# Altium PCB Tigershark 3D R2.3 - TR.PcbDoc (part 2 of 4)
Units mil, origin at the board's own origin, x right, y up, seen from the top; angles counter-clockwise.
Board outline 4100 x 4050 mil, 4 copper layers (Top Layer, Groun Plane, Power Plane, Bottom Layer), stack 61.73 mil thick; 367 components, 240 nets, 1160 pads, 805 vias.
Unrouted connection lines stored in the file: 6.
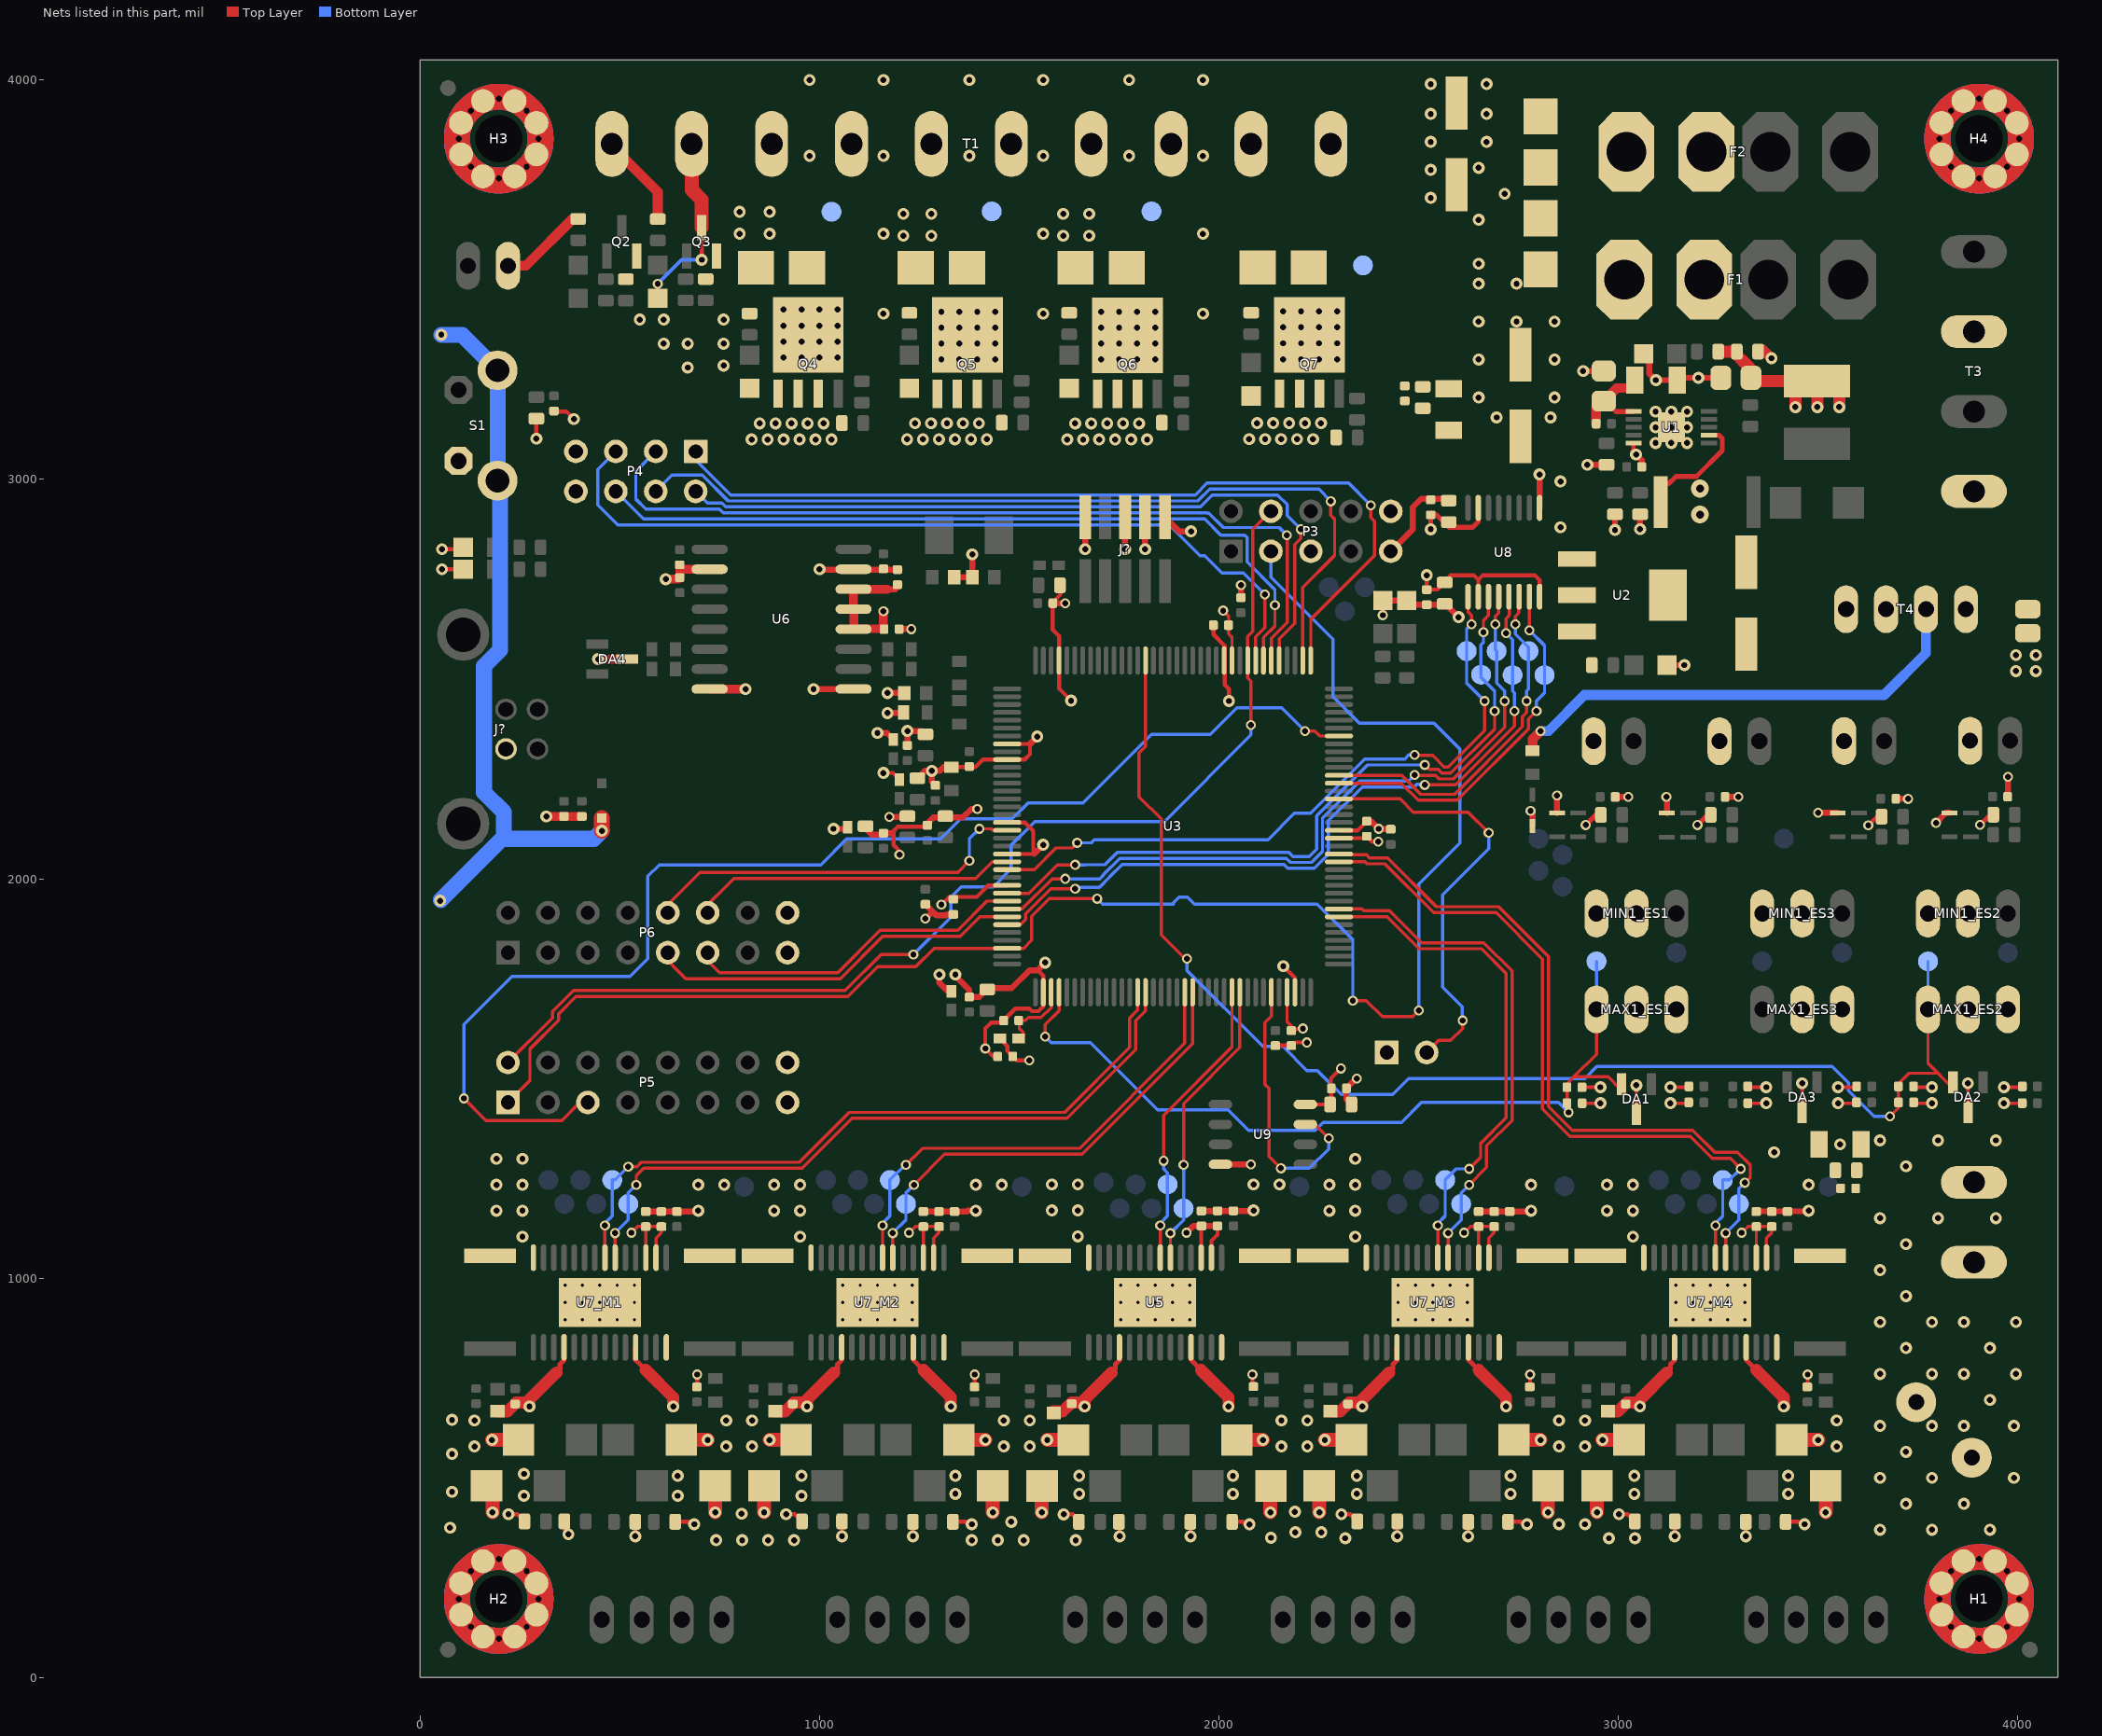
[diagram p4: the nets of this part, all layers, seen from the top]

## Part data
C1_ES1 C1_ES2 C1_ES3 C2_ES1 C2_ES2 C2_ES3: library part CC0402KRX7R8BB472, "CAP CER 0402 4.7nF 25V 10% X7R"
C3_M1 C3_M2 C3_M3 C3_M4 C5_M1 C5_M2 C5_M3 C5_M4 C6_M1 C6_M2 C6_M3 C6_M4 C8_M1 C8_M2 C8_M3 C8_M4 C52 C62 C67 C72: library part CC0603ZRY5V6BB105, "CAP CER 0603 1uF 10V Y5V"
C7: library part UPW1H471MHD1TO, "CAP ALU 470uF 50V 20%"
C9: library part C1206C475K5PACTU, "CAP CER 1206 4.7uF 50V 10% X5R"
C10: library part GRM21BR71H105KA12L, "CAP CER 0805 1uF 50V 10% X7R"
C11 C40: library part C0603C104K5RACTU, "CAP CER 0603 100nF 50V 10% X7R"
C12_M1 C12_M2 C12_M3 C12_M4 C14_M1 C14_M2 C14_M3 C14_M4 C51 C63 C69 C70 C75_M1 C75_M2 C75_M3 C75_M4: library part "100nF C0402 - GRM155R71C104KA88D", "Capacitor (Semiconductor SIM Model)"
C13 C17 C25 C28 C29 C32 C36 C55 C60: library part C1608JB0J106K080AB, "CAP CER 10UF 6.3V 10% JB 0603"
C15 C16 C18: "CAP ALUM 100UF 35V 20% SMD"
C20 C26: library part GRM155R71C104KA88D, "CAP CER 0.1UF (100nF) 16V 10% X7R 0402"
C21: library part C0805C106K8PACTU, "CAP CER 0805 10uF 10V 10% X5R"
C22: library part GRM155R60J105KE19D, "CAP CER 0402 1uF 6.3V 10% X5R"
C23 C27 C30_TR1 C30_TR2 C30_TR3 C30_TR4 C33 C34 C37 C38 C39 C41 C42 C45 C46 C47 C48 C53 C54 C56 C57 C58 C59 C61 C64 C65 C74: library part GRM155R71C104KA88D, "CAP CER 0402 100nF 16V 10% X7R"
C24 C50 C71_M1 C71_M2 C71_M3 C71_M4: library part GRM155R60J474KE19D, "0.47uF 6.3v C0402 - GRM155R60J474KE19D"
C35 C43 C44 C66_M1 C66_M2 C66_M3 C66_M4 C73: library part "Cap Semi", "Capacitor (Semiconductor SIM Model)"
C49 C68_M1 C68_M2 C68_M3 C68_M4: library part GRM155R71H103JA88D, "CAP CER 10000PF 50V X7R 0402"
C77 C80: library part CL31A106KBHNNNE, "CAP CER 10UF 50V 10% X5R 1206"
C78 C81: library part CL10B104KB8SFNC, "CAP CER 0.1UF 50V 10% X7R 0603"
C79 C82: library part CL05B103JB5NNNC, "CAP CER 10000PF 50V 5% X7R 0402"
D1: library part "D Zener", "Zener Diode"
D2: library part SK310A, "DIODE Schottky 3A SMA"
D3_TR1 D3_TR2 D3_TR3 D3_TR4 D5_TR1 D5_TR2 D5_TR3 D5_TR4: "High Conductance Fast Diode"
D4 D6 D12 D15 D17 D19: library part "D Schottky", "Schottky Diode"
D7 D9: "LED 0805 Red"
D8: "DIODE TVS"
D10 D11 D13 D14 D16 D18 D24 D29 D30 D31: "LED 0805 Yellow"
D20_M1 D20_M2 D20_M3 D20_M4 D21_M1 D21_M2 D21_M3 D21_M4 D22_M1 D22_M2 D22_M3 D22_M4 D23_M1 D23_M2 D23_M3 D23_M4 D25 D26 D27 D28: "DIODE TVS 30V SMA"
DA1 DA2 DA3 DA4: "PESDxL2BT TVS Diode Array 2x"
F1 F2: library part "Fuse 1", "Fuse"
J?: library part "ARM Cortex JTAG-DEBUG Header"
JP1: "SMD solder jumper"
L1: "IND 15uH 3.9A 20%"
M1_M1 M1_M2 M1_M3 M1_M4 M2 M3 T4: library part "Molex 0705430003 Alt", "Molex 4 Pin Clip Connector"
MAX1_ES1 MAX1_ES2 MAX1_ES3 MIN1_ES1 MIN1_ES2 MIN1_ES3: library part "Molex Endstop"
P1: library part "Header 2", "Header, 2-Pin"
P3: "Header, 5-Pin, Dual row"
P4: "Header, 4-Pin, Dual row"
P5 P6: "16 Pos 2.54mm Pin Connector Shrouded"
Q2 Q3 Q4 Q5 Q6 Q7: "N-Channel MOSFET"
R1: "Resistor"
R2_ES1 R2_ES2 R2_ES3 R3_ES1 R3_ES2 R3_ES3: library part ERJ-2GEJ272X, "RES SMD 2.7K OHM 5% 1/10W 0402"
R4 R5 R15 R16 R18 R20 R22 R23 R31_M1 R31_M2 R31_M3 R31_M4 R37: library part Res3, "Resistor"
R6 R46 R55 R59 R63 R67 R71: library part RC0603FR-07100KL, "RES 100K OHM 1/10W 1% 0603 SMD"
R7 R10 R12 R21: library part ERJ-3EKF1002V, "RES 0603 10K 100mW 1%"
R8 R11 R25 R26 R27 R28: library part ERJ-3EKF1001V, "RES 0603 1K 100mW 1%"
R9: library part RL2512FK-070R06L, "RES 0.06 OHM 1W 1% 2512 SMD"
R13 R47 R56 R60 R64 R68: library part RC0603JR-071K8L, "RES 0603 1.8K 100mW 5%"
R14_TR1 R14_TR2 R14_TR3 R14_TR4 R19_TR1 R19_TR2 R19_TR3 R19_TR4: library part ERJ3EKF4701V, "RES 0603 4.7K 100mW 1%"
R17: library part CRCW0402200KFKED, "RES 0402 22r 63mW 1%"
R24 R30_M1 R30_M2 R30_M3 R30_M4 R36: library part ERJ2GEJ105X, "RES 0402 1M 100mW 5%"
R32_M1 R32_M2 R32_M3 R32_M4 R33_M1 R33_M2 R33_M3 R33_M4 R38 R39: library part CSRN2512FTR100, "RES SMD 0.1 OHM 1% 2W 2512"
R45 R52 R58 R62 R66 R70: library part CRCW060310R0FKEA, "RES 0603 10r 100mW 1%"
S1: library part 1571610-2_1, "SWTCH Momentary Washable"
T1: library part "0395311010 - Molex 10 Position Connector", "MSBTV10 10 port connector same as RAMBo"
T2: library part con-phoenix-508_2
T3: library part con-phoenix-508_4
TP2 TP6 TP7 TP8 TP9_ES1 TP9_ES2 TP9_ES3 TP10_ES1 TP10_ES2 TP10_ES3 TP11 TP12 TP13 TP14 TP15 TP16 TP17 TP18 TP19 TP20 TP21 TP32_M1 TP32_M2 TP32_M3 TP32_M4 TP33_M1 TP33_M2 TP33_M3 TP33_M4 TP35_M1 TP35_M2 TP35_M3 TP35_M4 TP36_M1 TP36_M2 TP36_M3 TP36_M4 TP37_M1 TP37_M2 TP37_M3 TP37_M4 TP38 TP39_M1 TP39_M2 TP39_M3 TP39_M4 TP40_M1 TP40_M2 TP40_M3 TP40_M4 TP43 TP44 TP45 TP46 TP47 TP52_TR1 TP52_TR2 TP52_TR3 TP52_TR4: library part Socket, "Socket"
U1: library part LM25011, "REG BUCK"
U5 U7_M1 U7_M2 U7_M3 U7_M4: "DRV8825 Ti Stepper Driver"
U6: "USB Opto Isolator"
U8: library part TXB0106, "TXB0106 - Bidriectional Opendrain/pushpull level shift"
X2: library part XTAL, "Crystal Oscillator"

## Via types
v1: diameter 30, hole 15, Top Layer to Bottom Layer, tented both sides, 465 vias
v2: diameter 25, hole 15, Top Layer to Bottom Layer, tented both sides, 192 vias
v3: diameter 19.68, hole 7.87, Top Layer to Bottom Layer, 75 vias
v4: diameter 25, hole 15, Top Layer to Bottom Layer, 61 vias
v5: diameter 30, hole 15, Top Layer to Bottom Layer, 9 vias
v6: diameter 45, hole 20, Top Layer to Bottom Layer, tented both sides, 2 vias
v7: diameter 25, hole 15, Top Layer to Bottom Layer, tented bottom, 1 vias

## Nets (pads, with @x,y where several pads share a name; then routed paths per layer and width w, separated by ;. In a path a pad name is that pad's centre, name@x,y a point inside that pad or via, vN(x,y) a via of type N, cw(c..) or ccw(c..) an arc to the next point about the centre after c; other vN are vias at no path point)
3.3VCC: C12_M1.2 C12_M2.2 C12_M3.2 C12_M4.2 C14_M1.2 C14_M2.2 C14_M3.2 C14_M4.2 C18.1 C25.2 C26.2 C29.2 C34.1 C45.1 C46.1 C47.1 C48.1 C56.1 C64.1 C69.2 C70.2 C74.1 FB5.1 FB6.1 FB7.1 FB8.1 FB9.1 J?.1@1865,2904.92 MAX1_ES1.3 MAX1_ES2.3 MAX1_ES3.3 MIN1_ES1.3 MIN1_ES2.3 MIN1_ES3.3 P1.1 P3.10 P4.8 P5.16 P6.16 R2_ES1.2 R2_ES2.2 R2_ES3.2 R3_ES1.2 R3_ES2.2 R3_ES3.2 R6.2 R11.2 R19_TR1.2 R19_TR2.2 R19_TR3.2 R19_TR4.2 R21.2 T4.1 U2.3 U3.11 U3.62 U3.105 U3.125 U5.16 U5.17 U6.12 U6.13 U6.14 U7_M1.16 U7_M1.17 U7_M2.16 U7_M2.17 U7_M3.16 U7_M3.17 U7_M4.16 U7_M4.17 U8.2 U8.8 U9.8 | length 3611.2
  Top Layer w8: v2(528.74,1113.74) 544.74,1129.74 C12_M1.2@563.74,1129.74 ; U7_M1.17@565.16,1052.2 565.16,1128.32 C12_M1.2@563.74,1129.74 ; U7_M1.16@588.74,1054.21 590.75,1052.2 590.75,1100.75 603.74,1113.74 C14_M1.2@603.74,1128.74 ; C14_M1.2@603.74,1129.74 C12_M1.2@563.74,1129.74 ; R6.2@1211.77,2155 R6.2@1215,2151.77 ; v2(1223.74,1113.74) 1239.74,1129.74 C12_M2.2@1258.74,1129.74 ; U7_M2.17@1260.16,1052.2 1260.16,1128.32 C12_M2.2@1258.74,1129.74 ; U7_M2.16@1283.74,1054.21 1285.75,1052.2 1285.75,1100.75 1298.74,1113.74 C14_M2.2@1298.74,1128.74 ; C14_M2.2@1298.74,1129.74 C12_M2.2@1258.74,1129.74 ; J?.1@1865,2904.92 J?.1@1865.08,2905 ; v2(2010.47,2671.46) 2024.47,2657.46 2024.47,2627.54 2023.56,2626.63 2023.56,2613.37 2032.64,2604.29 U3.11@2032.64,2546.46 ; U3.105@2170.43,1715.75 2170.43,1641.77 2181.1,1631.1 2181.1,1620.1 2186.2,1615 2196.2,1625 v2(2210,1625) ; v4(2613.74,1113.74) 2629.74,1129.74 C12_M3.2@2648.74,1129.74 ; U7_M3.17@2650.16,1052.2 2650.16,1128.32 C12_M3.2@2648.74,1129.74 ; U7_M3.16@2673.74,1054.21 2675.75,1052.2 2675.75,1100.75 2688.74,1113.74 C14_M3.2@2688.74,1128.74 ; C14_M3.2@2688.74,1129.74 C12_M3.2@2648.74,1129.74 ; R3_ES1.2@2909,1438.03 v1(2955,1438.03) ; v1(3130,1438.03) R2_ES1.2@3176,1438.03 ; v4(3308.74,1113.74) 3324.74,1129.74 C12_M4.2@3343.74,1129.74 ; R3_ES3.2@3324,1438.03 v1(3370,1438.03) ; U7_M4.17@3345.16,1052.2 3345.16,1128.32 C12_M4.2@3343.74,1129.74 ; U7_M4.16@3368.74,1054.21 3370.75,1052.2 3370.75,1100.75 3383.74,1113.74 C14_M4.2@3383.74,1128.74 ; C14_M4.2@3383.74,1129.74 C12_M4.2@3343.74,1129.74 ; v1(3550,1438.03) R2_ES3.2@3596,1438.03 ; R3_ES2.2@3739,1438.03 v1(3785,1438.03) ; v1(3965,1438.03) R2_ES2.2@4011,1438.03
  Top Layer w10: v1(291,3102) R21.2@291,3149.47 ; v1(1160,2265) 1183.62,2265 FB7.1@1200,2248.62 ; v2(1305,1935) 1324.5,1954.5 1393.54,1954.5 1422.51,1983.46 U3.62@1469.65,1983.46 ; FB9.1@1451.38,1600 1470,1581.38 1470,1569 1484,1555 1494,1545 v4(1525,1545) ; U5.17@1955.42,1051.94 C69.2@1955.42,1129.9 ; U5.16@1981.01,1051.94 1981.01,1093.49 1996.26,1108.74 C70.2@1996.26,1130.74 ; U9.8@2216.3,1435 C29.2@2278.23,1435 2281,1437.77 2281,1475 2280,1476 2280,1500 v2(2305,1525) ; U3.125@2300.35,2101.57 C46.1@2365.57,2101.57 ; C46.1@2371,2105 2383,2093 v2(2398.5,2093) ; v1(2520,2760) C26.2@2520,2724 2547.23,2724 C25.2@2565,2741.77 ; C25.2@2560,2740 2580,2760 2637.44,2760 2649.02,2748.42 ; U8.2@2649.02,2706.22 2649.02,2748.42 ; U8.8@2802.57,2706.22 2802.57,2747.87 2790.44,2760 2660.61,2760 2649.02,2748.42 ; v2(3625.47,2133.7) 3647.24,2155.47 R19_TR4.2@3655.94,2155.47 ; R19_TR3.2@3935,2161.42 R19_TR3.2@3935.94,2160.47
  Top Layer w12: v2(2917.95,2134.53) 2943.42,2160 R19_TR2.2@2956.18,2160 ; v2(3197.95,2134.53) 3223.42,2160 R19_TR1.2@3231.18,2160 ; v2(3905.47,2135) R19_TR3.2@3933.44,2162.97
  Top Layer w15: v1(1035,2125) 1059.72,2125 FB5.1@1060,2124.72 ; v1(1145,2365) 1168.62,2365 FB8.1@1185,2348.62 ; 1170,2725 1190,2725 C56.1@1201,2736 ; v2(1175,2155) 1201.77,2155 1206.77,2150 R6.2@1211.77,2155 ; v1(1300,1760) 1300,1739.72 FB6.1@1320,1719.72 ; J?.1@1865.08,2905 1900.08,2870 v1(1930,2870) ; v4(1918.77,1113.71) 1935.8,1130.74 C69.2@1956.26,1130.74 C70.2@1996.26,1130.74 ; C46.1@2370,2106 C46.1@2371,2105
  Top Layer w22: v2(1160,2670) 1160,2626 1086.12,2626 1086.12,2674 U6.13@1085.12,2675 U6.14@1085.12,2725 1170,2725
+5VCC: C11.1 C17.2 C20.2 C21.1 L1.2 R7.2 R8.2 R10.1 T4.2 U2.1 U8.15 | length 738.4
  Top Layer w12: v1(2530,2875) C20.2@2530,2911 ; C20.2@2530,2916 2531.51,2915.49 2544.88,2911 2575.88,2880 2635,2880 2649.02,2894.02 U8.15@2649.02,2928.66
  Top Layer w15: v1(2922.31,3036.43) 2970.09,3036.43 R7.2@2970.32,3036.65 ; v1(3054.31,2875.43) R10.1@3054.31,2912.66
  Top Layer w30: R8.2@3249.77,3320 3287.82,3320 C21.1@3329.51,3278.31 ; C21.1@3339.98,3246.17 L1.2@3497.31,3246.17 ; v1(3443,3181) L1.2@3443,3241.17 ; v1(3498,3181) L1.2@3498,3245.48 ; v1(3553,3181) L1.2@3553,3246
  other v1: 2855,2880 2855,2995
+12VCC1: C7.1 C35.1 C66_M1.1 C66_M2.1 C66_M3.1 C66_M4.1 C80.1 C81.1 C82.2 R30_M1.2 R30_M2.2 R30_M3.2 R30_M4.2 R36.2 T2.1 U5.4 U5.11 U7_M1.4 U7_M1.11 U7_M2.4 U7_M2.11 U7_M3.4 U7_M3.11 U7_M4.4 U7_M4.11 | length 2331.6
  Top Layer w12: 341.26,763.74 350.26,772.74 350.26,784.25 360.43,794.42 U7_M1.4@360.43,826.8 U7_M1.4@360.43,827.8 ; U7_M1.11@539.57,827.8 539.57,795.43 565,770 ; 1036.26,763.74 1045.26,772.74 1045.26,784.25 1055.43,794.42 U7_M2.4@1055.43,826.8 U7_M2.4@1055.43,827.8 ; U7_M2.11@1234.57,827.8 1234.57,795.43 1260,770 ; 1731.29,763.71 1740.29,772.71 1740.29,784.22 1750.46,794.39 U5.4@1750.46,826.76 ; U5.11@1929.6,827.76 1929.6,795.4 1955.03,769.97 ; 2426.26,763.74 2435.26,772.74 2435.26,784.25 2445.43,794.42 U7_M3.4@2445.43,826.8 U7_M3.4@2445.43,827.8 ; U7_M3.11@2624.57,827.8 2624.57,795.43 2650,770 ; 3121.26,763.74 3130.26,772.74 3130.26,784.25 3140.43,794.42 U7_M4.4@3140.43,826.8 U7_M4.4@3140.43,827.8 ; U7_M4.11@3319.57,827.8 3319.57,795.43 3345,770
  Top Layer w30: C66_M1.1@193.74,666.18 218.7,666.18 241.26,688.74 263.74,688.74 v1(273.74,678.74) 273.74,696.22 341.26,763.74 ; 565,770 633.74,701.26 v1(633.74,678.74) ; C66_M2.1@888.74,666.18 913.7,666.18 936.26,688.74 958.74,688.74 v1(968.74,678.74) 968.74,696.22 1036.26,763.74 ; 1260,770 1328.74,701.26 v1(1328.74,678.74) ; C35.1@1583.77,666.15 1608.73,666.15 1631.29,688.71 1653.77,688.71 v1(1663.77,678.71) 1663.77,696.19 1731.29,763.71 ; 1955.03,769.97 2023.77,701.23 v1(2023.77,678.71) ; C66_M3.1@2278.74,666.18 2303.7,666.18 2326.26,688.74 2348.74,688.74 v1(2358.74,678.74) 2358.74,696.22 2426.26,763.74 ; 2650,770 2718.74,701.26 v1(2718.74,678.74) ; C66_M4.1@2973.74,666.18 2998.7,666.18 3021.26,688.74 3043.74,688.74 v1(3053.74,678.74) 3053.74,696.22 3121.26,763.74 ; 3345,770 3413.74,701.26 v1(3413.74,678.74)
  other v1: 741.26,343.74 806.26,343.74 871.26,343.74 936.26,343.74 1381.26,343.74 1446.26,343.74 1511.26,343.74 1641.26,343.74 2316.26,348.74 2976.26,348.74 3041.26,348.74 2130,350 2191.26,363.74 2256.26,363.74 3655,370 3785,370 75,375 2851.26,383.74 2916.26,383.74 1480,390 805,410 2190,415 3720,435 260,455 645,455 955,455 1340,460 1650,460 2035,460 2345,460 2730,460 3040,460 3425,460 80,465 3655,500 3785,500 645,505 955,505 1340,505 1650,505 2035,505 2345,505 2730,505 3040,505 3425,505 260,510 80,560 3720,565 136.26,578.74 766.26,578.74 831.26,578.74 1461.26,578.74 1526.26,578.74 2156.29,578.71 2221.29,578.71 2851.26,578.74 2916.26,578.74 3546.26,578.74 3655,630 3785,630 136.26,643.74 766.26,643.74 831.26,643.74 1461.26,643.74 1526.26,643.74 2156.29,643.71 2221.29,643.71 2851.26,643.74 2916.26,643.74 3546.26,643.74 80,645 3655,760 3785,760 3720,825 3655,890 3785,890 3720,955 3655,1020 3720,1085 3655,1150 3800,1150 3945,1150 3720,1280 3655,1345 3800,1345 3945,1345
+12VCC2: C9.1 C10.1 C16.1 C77.1 C78.1 C79.2 D6.2 D12.2 D15.2 D17.2 F1.2 FAN-1.1 R1.2 R13.2 R17.2 R47.2 R56.2 R60.2 R64.2 T1.1 T1.3 T1.5 T1.7 T4.3 U1.1 | length 1845.7
  Top Layer w12: C10.1@2984.68,3178.95 2993.83,3169.8 U1.1@3037.83,3169.8
  Top Layer w24: R17.2@2944.31,3139.43 C10.1@2944.31,3177.02 ; C10.1@2963.31,3196.02 2995.72,3228.43 C9.1@3021.15,3228.43
  Top Layer w25: FAN-1.1@230,3535 265,3535 382.34,3652.34 R13.2@396,3652.34 ; T1.1@480,3810 T1.1@495,3795 ; T1.1@480,3835 595,3720 R47.2@595,3651.77 ; R1.2@2785,2320.83 2785,2350 v2(2805,2370)
  Bottom Layer w25: v2(2805,2370) 2825,2370 2915,2460 3665,2460 3770,2565 T4.3@3770,2675
  other v1: 2650,3205 2840,3205 2650,3300 2840,3300 2650,3395 2745,3395 2840,3395 2650,3490 2745,3490 1210,3610 1280,3610 1610,3610 1675,3610 800,3615 875,3615 1210,3665 1280,3665 1610,3665 1675,3665 800,3670 875,3670
+12VCC3: C15.1 D4.2 D19.2 F2.2 R68.2 T1.9
  other v1: 2530,3705 2530,3775 2530,3845 2670,3845 2530,3915 2670,3915 2530,3990 2670,3990
AVREF: C65.1 FB9.2 U3.75 | length 169
  Top Layer w8: C65.1@1499,1645 1515,1645 1522.31,1652.31 1554.56,1652.31 1579.88,1677.64 U3.75@1579.88,1715.75 ; C65.1@1500,1636 1500,1625 1510,1615 FB9.2@1510,1603.62
BED_PWM: TP38.1 U3.132 U8.7 | length 932.7
  Top Layer w8: U3.132@2300.35,2239.37 2456.18,2239.37 2499.05,2196.5 2596.5,2196.5 2775,2375 2775,2400 v2(2795,2420) ; U8.7@2775,2704.24 U8.7@2776.98,2706.22 v2(2776.98,2621.98)
  Bottom Layer w8: v2(2776.98,2621.98) 2815,2583.95 TP38.1@2815,2510 2815,2465 2795,2445 v2(2795,2420)
DIR1: TP39_M1.1 U3.87 U7_M1.20 | length 1761
  Top Layer w8: U7_M1.20@488.39,1052.2 v2(488.39,1112.64) ; v2(541.26,1233.74) 541.26,1256.26 560,1275 956.07,1275 1081.07,1400 1619.71,1400 1791.5,1571.79 1791.5,1644.73 1816.1,1669.34 U3.87@1816.1,1715.75
  Bottom Layer w8: v2(488.39,1112.64) 521.23,1145.48 TP39_M1.1@521.23,1185.77 521.23,1213.71 v2(541.26,1233.74)
DIR2: TP39_M2.1 U3.93 U7_M2.20 | length 1176.6
  Top Layer w8: U7_M2.20@1183.39,1052.2 v2(1183.39,1112.64) ; v2(1236.26,1233.74) 1312.52,1310 1657.43,1310 1934.21,1586.79 U3.93@1934.21,1715.75
  Bottom Layer w8: v2(1183.39,1112.64) 1216.23,1145.48 TP39_M2.1@1216.23,1185.77 1216.23,1213.71 v2(1236.26,1233.74)
DIR3: TP39_M3.1 U3.116 U7_M3.20 | length 1280.8
  Top Layer w8: U3.116@2300.35,1924.41 2357.8,1924.41 2362.48,1919.72 2427.15,1919.72 2506.87,1840 2662.72,1840 2733.5,1769.22 2733.5,1395.01 2670,1331.51 2670,1277.48 v4(2626.26,1233.74) ; U7_M3.20@2573.39,1052.2 v4(2573.39,1112.64)
  Bottom Layer w8: v4(2573.39,1112.64) 2606.23,1145.48 TP39_M3.1@2606.23,1185.77 2606.23,1213.71 v4(2626.26,1233.74)
DIR4: TP39_M4.1 U3.123 U7_M4.20 | length 1828.5
  Top Layer w8: U3.123@2300.35,2062.2 2302.56,2060 2369.33,2060 2376.83,2052.5 2421.65,2052.5 2544.15,1930 2700,1930 2825,1805 2825,1430 2885,1370 3186.21,1370 3241.21,1315 3298.23,1315 3330,1283.23 3330,1252.54 v4(3316.23,1238.77) ; U7_M4.20@3268.39,1052.2 v4(3268.39,1112.64)
  Bottom Layer w8: v4(3268.39,1112.64) 3301.23,1145.48 TP39_M4.1@3301.23,1185.77 3301.23,1223.77 v4(3316.23,1238.77)
DIR_EXP1: P6.11 U3.64 | length 864.5
  Top Layer w8: P6.11@700,1815 750,1765 1045.7,1765 1151.68,1870.98 1345.98,1870.98 1419.09,1944.09 U3.64@1469.65,1944.09
DIR_EXP2: P6.12 U3.59 | length 822.5
  Top Layer w8: P6.12@700,1915 786,2001 1391,2001 1432.52,2042.52 U3.59@1469.65,2042.52
DIR_Z: TP20.1 U3.99 U5.20 | length 735.6
  Top Layer w8: U5.20@1878.42,1052.17 v4(1878.42,1112.61) ; v4(1911.26,1283.74) 1911.26,1436.55 2052.32,1577.62 U3.99@2052.32,1715.75
  Bottom Layer w8: v4(1878.42,1112.61) 1911.26,1145.45 TP20.1@1911.26,1174.74 v4(1911.26,1283.74)
EN1: TP32_M1.1 U3.86 U7_M1.21 | length 1780.1
  Top Layer w8: U7_M1.21@462.8,1052.2 v2(462.8,1132.05) ; v2(521.26,1278.74) 542.53,1278.74 553.79,1290 949.85,1290 1074.85,1415 1613.49,1415 1776.5,1578.01 1776.5,1650.95 1796.42,1670.86 U3.86@1796.42,1715.75
  Bottom Layer w8: v2(462.8,1132.05) 462.8,1137.34 481.23,1155.77 TP32_M1.1@481.23,1245.77 488.29,1245.77 v2(521.26,1278.74)
EN2: TP32_M2.1 U3.92 U7_M2.21 | length 1206.8
  Top Layer w8: U7_M2.21@1157.8,1052.2 v2(1157.8,1132.05) ; v2(1216.26,1283.74) 1257.52,1325 1651.21,1325 1914.53,1588.31 U3.92@1914.53,1715.75
  Bottom Layer w8: v2(1157.8,1132.05) 1157.8,1137.34 1176.23,1155.77 TP32_M2.1@1176.23,1245.77 v2@1214.2,1283.74
EN3: TP32_M3.1 U3.115 U7_M3.21 | length 1277.1
  Top Layer w8: U3.115@2300.35,1904.72 2420.94,1904.72 2500.66,1825 2656.51,1825 2718.5,1763.01 2718.5,1401.22 2655,1337.72 2655,1302.48 v4(2626.26,1273.74) ; U7_M3.21@2547.8,1052.2 v4(2547.8,1132.05)
  Bottom Layer w8: v4(2547.8,1132.05) 2547.8,1137.34 2566.23,1155.77 TP32_M3.1@2566.23,1245.77 2594.2,1273.74 v4(2626.26,1273.74)
EN4: TP32_M4.1 U3.122 U7_M4.21 | length 1801.8
  Top Layer w8: U3.122@2300.35,2042.52 2365.6,2042.52 2370.62,2037.5 2415.44,2037.5 2537.94,1915 2693.79,1915 2810,1798.79 2810,1423.79 2878.79,1355 3180,1355 3235,1300 3280,1300 v4(3306.23,1273.77) ; U7_M4.21@3242.8,1052.2 v4(3242.8,1132.05)
  Bottom Layer w8: v4(3242.8,1132.05) 3242.8,1137.34 3261.23,1155.77 TP32_M4.1@3261.23,1245.77 3278.23,1245.77 v4(3306.23,1273.77)
EN_EXP1: P6.9 U3.66 | length 960.7
  Top Layer w8: P6.9@600,1815 665,1750 1051.91,1750 1157.9,1855.98 1352.2,1855.98 1400.94,1904.72 U3.66@1469.65,1904.72
EN_EXP2: P6.10 U3.55 | length 990.4
  Top Layer w8: P6.10@600,1915 701,2016 1346,2016 v2(1375,2045) ; v2(1400,2125) 1430,2125 1433.74,2121.26 U3.55@1469.65,2121.26
  Bottom Layer w8: v2(1375,2045) 1375,2100 v2(1400,2125)
EN_Z: TP16.1 U3.98 U5.21 | length 746.3
  Top Layer w8: U5.21@1852.83,1052.17 v4(1852.83,1132.02) ; v4(1861.26,1293.74) 1861.26,1407.77 2032.64,1579.15 U3.98@2032.64,1715.75
  Bottom Layer w8: v4(1852.83,1132.02) 1852.83,1137.31 1871.26,1155.74 1871.26,1263.74 1861.26,1273.74 v4(1861.26,1293.74)
ERASE: P1.2 U3.130 | length 1083.1
  Top Layer w8: U3.130@2300.35,2200 2453.13,2200 2486.63,2166.5 2623.5,2166.5 v2(2675,2115) ; P1.2@2520,1565 2550,1595 2580,1595 2610,1625 v2(2610,1645)
  Bottom Layer w8: v2(2610,1645) 2608.5,1646.5 2608.5,1679.73 2560,1728.23 2560,1960 2675,2075 v2(2675,2115)
EXP_CS: P3.5
EXP_CS2: P5.5 U3.138 | length 3185.8
  Top Layer w8: v2(110,1450) 165,1395 355,1395 P5.5@400,1440 ; v2(2215,2370) 2240,2370 2252.52,2357.48 U3.138@2300.35,2357.48
  Bottom Layer w8: v2(110,1450) 110,1635 230,1755 525,1755 570,1800 570,2006.36 598.64,2035 1002.98,2035 1067.98,2100 1303.49,2100 1353.49,2150 1482.16,2150 1522.16,2190 1659.85,2190 1831.35,2361.5 1978.27,2361.5 2045.27,2428.5 2156.5,2428.5 v2(2215,2370)
FET_PWM1: TP43.1 U3.60 U8.1 | length 1716.7
  Top Layer w8: U3.60@1469.65,2022.83 1537.83,2022.83 1592.1,2077.1 1632.1,2077.1 v2(1645,2090) ; v2(2490,2310) 2491.5,2308.5 2534.99,2308.5 2563.49,2280 2573.93,2280 2665,2371.07 v2@2665,2435 ; U8.1@2623.43,2706.22 2623.43,2668.34 2631.98,2659.79 v2(2631.98,2636.98)
  Bottom Layer w8: v2(1645,2090) 1680,2090 1687.89,2097.89 2122.89,2097.89 2188.91,2163.91 2229.05,2163.91 2365.15,2300 2465,2300 2475,2310 v2(2490,2310) ; v2(2631.98,2636.98) 2620,2625 TP43.1@2620,2570 2620,2490 v2(2665,2445)
FET_PWM2: TP44.1 U3.63 U8.3 | length 1802.5
  Top Layer w8: U3.63@1469.65,1963.78 1524.03,1963.78 1595.25,2035 v2(1640,2035) ; v2(2515,2285) 2526.5,2273.5 2548.78,2273.5 2557.28,2265 2580.15,2265 2690,2374.85 v2@2690,2410 ; v2(2661.98,2616.98) 2661.98,2646.98 2674.61,2659.61 U8.3@2674.61,2706.22 U8.3@2675,2705.83
  Bottom Layer w8: v2(1640,2035) 1664.23,2035 ; 1664.23,2035.1 1714.44,2035.1 1745.23,2065.89 2175.02,2065.89 2185.02,2055.89 2225.89,2055.89 2244.05,2074.05 2244.05,2157.69 2371.36,2285 v2(2515,2285) ; TP44.1@2655,2505 2690,2470 v2(2690,2420) ; TP44.1@2656.1,2511.1 2656,2511.2 2656,2586 2661.98,2591.98 v2(2661.98,2616.98)
FET_PWM3: TP45.1 U3.65 U8.4 | length 1830
  Top Layer w8: U3.65@1469.65,1924.41 1506.98,1924.41 1582.57,2000 v2(1615,2000) ; v2(2490,2260) 2491.5,2258.5 2542.57,2258.5 2551.07,2250 2586.36,2250 2715,2378.64 v2@2715,2435 ; v2(2691.98,2636.98) 2691.98,2656.98 2700,2665 2700,2706.02 U8.4@2700.2,2706.22
  Bottom Layer w8: v2(1615,2000) 1701.21,2000 1711.5,2010.29 1711.5,2010.95 1751.44,2050.89 2168.8,2050.89 2178.8,2040.89 2232.1,2040.89 2259.05,2067.84 2259.05,2151.48 2352.57,2245 2475,2245 v2(2490,2260) ; v2(2691.98,2636.98) 2691.98,2573.02 TP45.1@2695,2570 2695,2490 2715,2470 v2(2715,2445)
FET_PWM4: TP46.1 U3.67 U8.5 | length 1881.2
  Top Layer w8: U3.67@1469.65,1885.04 1503.4,1885.04 1516.08,1897.72 1516.08,1912.29 1578.79,1975 v2(1640,1975) ; v2(2515,2235) 2592.57,2235 2740,2382.43 v2(2740,2420) ; v2(2718.48,2615.22) 2718.48,2651.5 2726.98,2660 2726.98,2703.45 2725,2705.42 U8.5@2725.8,2706.22
  Bottom Layer w8: v2(1640,1975) 1643.5,1978.5 1700.93,1978.5 1726.5,2004.07 1726.5,2004.73 1757.66,2035.89 2162.59,2035.89 2172.59,2025.89 2238.32,2025.89 2274.05,2061.63 2274.05,2145.27 2358.79,2230 2488.5,2230 2495,2236.5 2513.5,2236.5 v2(2515,2235) ; v2(2718.48,2615.22) 2735,2598.7 TP46.1@2735,2510 2735,2470 2740,2465 v2(2740,2420)
FET_PWM5: TP47.1 U3.133 U8.6 | length 888.4
  Top Layer w8: U3.133@2300.35,2259.06 2457.71,2259.06 2505.27,2211.5 2590.29,2211.5 2760,2381.21 2760,2406.21 2770,2416.21 v2@2770,2435 ; v2(2741.98,2636.98) 2741.98,2656.98 2750,2665 2750,2704.83 U8.6@2751.39,2706.22
  Bottom Layer w8: v2(2741.98,2636.98) 2741.98,2613.02 2775,2580 TP47.1@2775,2570 2775,2475 2770,2470 v2(2770,2445)
FGND: D8.C H1.1 H2.1 H3.1 H4.1 JP1.1 S1.3 S1.4 | length 1916.2
  Top Layer w40: v1(455,2120) D8.C@455,2151.69
  Bottom Layer w40: v1@52,1947 205,2100 435,2100 v1(455,2120) ; v1(53,3362) 105,3362 S1.3@194,3273 S1.4@194,2997 200.25,2990.75 200.25,2572.95 160,2532.7 160,2216.4 210,2166.4 210,2105
  Bottom Layer w50: 122.6,271.1 H2.1@126.85,266.85 ; 122.6,3778.9 H3.1@126.85,3783.15 ; 3828.9,3927.4 H4.1@3833.15,3923.15 ; H1.1@3973.15,266.85 3977.4,271.1
  other v1: 50,1945 3995,2520 4045,2520 3995,2560 4045,2560
FN1: D11.C Q3.3 T1.2 | length 467.3
  Top Layer w10: D11.C@595,3453 v2(595,3490) ; v1(705,3549.78) Q3.3@705,3630.43
  Top Layer w35: T1.2@680,3835 680,3725 705,3700 Q3.3@705,3630.43
  Bottom Layer w10: v2(595,3490) 654.78,3549.78 v1(705,3549.78)
GND: C1_ES1.1 C1_ES2.1 C1_ES3.1 C2_ES1.1 C2_ES2.1 C2_ES3.1 C3_M1.2 C3_M2.2 C3_M3.2 C3_M4.2 C5_M1.2 C5_M2.2 C5_M3.2 C5_M4.2 C6_M1.2 C6_M2.2 C6_M3.2 C6_M4.2 C7.2 C8_M1.2 C8_M2.2 C8_M3.2 C8_M4.2 C9.2 C10.2 C11.2 C12_M1.1 C12_M2.1 C12_M3.1 C12_M4.1 C13.1 C14_M1.1 C14_M2.1 C14_M3.1 C14_M4.1 C15.2 C16.2 C17.1 C18.2 C20.1 C21.2 C22.2 C23.2 C25.1 C26.1 C27.2 C28.1 C29.1 C30_TR1.2 C30_TR2.2 C30_TR3.2 C30_TR4.2 C32.1 C33.2 C34.2 C36.1 C37.2 C38.2 C39.2 C41.2 C42.2 C43.1 C44.1 C45.2 C46.2 C47.2 C48.2 C50.1 C51.1 C52.2 C53.2 C54.2 C55.1 C56.2 C57.2 C60.1 C61.2 C62.2 C63.1 C64.2 C65.2 C67.2 C69.1 C70.1 C71_M1.1 C71_M2.1 C71_M3.1 C71_M4.1 C72.2 C73.1 C74.2 C75_M1.1 C75_M2.1 C75_M3.1 C75_M4.1 C77.2 C78.2 C79.1 C80.2 C81.2 C82.1 D1.1 D4.1 D5_TR1.1 D5_TR2.1 D5_TR3.1 D5_TR4.1 D6.1 D7.C D9.C D20_M1.C D20_M2.C D20_M3.C D20_M4.C D21_M1.C D21_M2.C D21_M3.C D21_M4.C D22_M1.C D22_M2.C D22_M3.C D22_M4.C D23_M1.C D23_M2.C D23_M3.C D23_M4.C D24.C D25.C D26.C D27.C D28.C D29.C D30.C D31.C DA1.3 DA2.3 DA3.3 J?.3@1815,2904.92 J?.5@1765,2904.92 J?.9 JP1.2 MAX1_ES1.2 MAX1_ES2.2 MAX1_ES3.2 MIN1_ES1.2 MIN1_ES2.2 MIN1_ES3.2 P2_TR1.2 P2_TR2.2 P2_TR3.2 P2_TR4.2 P3.9 P4.7 P5.15 P6.15 Q2.2 Q3.2 Q4.1 Q4.2 Q4.3 Q5.1 Q5.2 Q5.3 Q6.1 Q6.2 Q6.3 Q7.1 Q7.2 Q7.3 R4.2 R9.1 R12.2 R23.1 R32_M1.1 R32_M2.1 R32_M3.1 R32_M4.1 R33_M1.1 R33_M2.1 R33_M3.1 R33_M4.1 R38.1 R39.1 R46.2 R55.2 R59.2 R63.2 R67.2 R71.2 S1.2 T2.2 T3.2 T3.4 T4.4 U1.5 U1.7 U1.11 U2.2 U2.4 U3.12 U3.33 U3.44 U3.46 U3.54 U3.58 U3.74 U3.106 U3.126 U5.14 U5.28 U5.29 U6.9 U6.15 U7_M1.14 U7_M1.28 U7_M1.29 U7_M2.14 U7_M2.28 U7_M2.29 U7_M3.14 U7_M3.28 U7_M3.29 U7_M4.14 U7_M4.28 U7_M4.29 U8.9 U9.4 | length 9123
  Top Layer w10: v1(55,2775) D29.C@108,2775 ; v1(55,2825) 103,2825 D24.C@108,2830 ; v1(221.26,408.74) 243.49,408.74 C3_M1.2@261.23,391 ; C63.1@335,3170 366,3170 v1(385,3151) ; C5_M1.2@361.23,391 361.23,368.77 v1(371.26,358.74) ; v1@538.77,361.23 C8_M1.2@538.77,390 ; C6_M1.2@638.77,390 670,390 v1@686.26,373.74 ; C75_M1.1@693.74,727.44 v4(693.74,758.74) ; v1(916.26,408.74) 938.49,408.74 C3_M2.2@956.23,391 ; v1(1056.23,353.77) C5_M2.2@1056.23,391 ; 1179.12,2113.7 1185.42,2120 ; v2@1200,2070 1185.42,2084.58 1185.42,2120 ; v1(1233.77,353.74) C8_M2.2@1233.77,390 ; C37.2@1265,2130 1195.42,2130 1185.42,2120 ; R4.2@1319.97,2279.53 1389.88,2279.53 1408.78,2298.43 U3.46@1469.65,2298.43 1513.43,2298.43 1526.69,2311.69 1526.69,2331.75 1526.69,2337.8 U3.44@1469.65,2337.8 ; C6_M2.2@1333.77,390 1365,390 v1@1381.26,373.74 ; C75_M2.1@1388.74,727.44 v4(1388.74,758.74) ; C64.2@1446.3,1555 1435,1555 v2(1415,1575) 1415,1625 1430,1640 1455,1640 1490,1675 1525,1675 1531.69,1668.31 1547.93,1668.31 1560.2,1680.58 U3.74@1560.2,1715.75 1560.2,1757.01 1546.1,1771.1 ; U3.58@1469.65,2062.2 1537.2,2062.2 ; U3.54@1469.65,2140.94 1514.06,2140.94 1535,2120 1535,2065 1537.5,2062.5 ; C33.2@1583.7,2693.91 1583.7,2623.86 1599.57,2607.99 U3.33@1599.57,2546.46 1599.57,2476.26 v1(1629.72,2446.1) ; C33.2@1585,2693.91 1602.56,2711.47 C32.1@1602.56,2726.1 ; v1(1611.29,408.71) 1633.52,408.71 C52.2@1651.26,390.97 ; v1(1751.26,353.74) C62.2@1751.26,390.97 ; v1(1928.8,353.71) C72.2@1928.8,389.97 ; C47.2@1986.3,2635 1986.3,2611.27 2012.95,2584.61 U3.12@2012.95,2546.46 ; 2014.73,2583.4 2014.73,2485.27 2025,2475 v1(2025,2445) ; C67.2@2028.8,389.97 2060.03,389.97 v1@2076.29,373.71 ; C51.1@2083.77,727.41 v4(2083.77,758.71) ; C23.2@2141.1,1582.4 2181.1,1582.4 2188.7,1590 v2(2220,1590) ; v1(2161.1,1781.1) 2190.12,1752.09 U3.106@2190.12,1715.75 ; U3.126@2300.35,2121.26 2347.56,2121.26 C46.2@2370,2143.7 ; v1(2306.26,408.74) 2328.49,408.74 C3_M3.2@2346.23,391 ; v1(2446.23,353.77) C5_M3.2@2446.23,391 ; v1(2623.77,353.74) C8_M3.2@2623.77,390 ; C6_M3.2@2723.77,390 2755,390 v1@2771.26,373.74 ; C75_M3.1@2778.74,727.44 v4(2778.74,758.74) ; C2_ES1.1@2917.56,1478.03 v1(2955,1478.03) ; v1(3001.26,408.74) 3023.49,408.74 C3_M4.2@3041.23,391 ; v1@3037.83,3068.91 U1.5@3037.83,3091.06 ; DA1.3@3045,1395.63 v1(3045,1483.03) ; v1(3130,1478.03) C1_ES1.1@3167.91,1478.03 ; v1(3141.23,353.77) C5_M4.2@3141.23,391 ; v1(3318.77,353.74) C8_M4.2@3318.77,390 ; C2_ES3.1@3324,1478.03 v1(3370,1478.03) ; C6_M4.2@3418.77,390 3450,390 v1@3466.26,373.74 ; DA3.3@3460,1400.63 v1(3460,1488.03) ; C75_M4.1@3473.74,727.44 v4(3473.74,758.74) ; v1(3550,1478.03) C1_ES3.1@3587.91,1478.03 ; C2_ES2.1@3738.7,1478.03 v1(3785,1478.03) ; DA2.3@3875,1400.63 v1(3875,1488.03) ; v1(3965,1478.03) C1_ES2.1@4002.91,1478.03
  Top Layer w12: 3125.95,2989 3144.36,3007.41 3195.42,3007.41 3259.88,3071.87 3259.88,3102.35 3251.49,3110.74 U1.7@3226.8,3110.74
  Top Layer w15: C12_M1.1@565,1166.7 C14_M1.1@604,1166.7 C71_M1.1@643,1166.7 694.22,1166.7 v1(696.26,1168.74) ; v1(985,2475) U6.9@1085.12,2475 ; v1(1000,2775) 1001.3,2773.7 C56.2@1200,2773.7 ; C55.1@1110,2131.77 1131.77,2110 C54.2@1151.3,2110 ; C54.2@1160,2113.7 1179.12,2113.7 ; v1(1170,2415) 1208.94,2415 R23.1@1210.47,2416.54 ; v1(1170,2465) C73.1@1212.44,2465 ; C74.2@1198.7,2625 v2(1230,2625) ; C61.2@1220,2333.7 v1(1220,2370) 1256.77,2370 C60.1@1265,2361.77 ; C28.1@1246.22,2252.56 1263.66,2270 v1(1281.22,2270) ; C12_M2.1@1260,1166.7 C14_M2.1@1299,1166.7 C71_M2.1@1338,1166.7 1369.22,1166.7 1371.26,1168.74 v1(1391.26,1168.74) ; v2(1265,1900) 1265.82,1900 1283.56,1917.74 ; C37.2@1265,2133.7 1284.96,2153.66 1358.66,2153.66 1380,2175 v2(1395,2175) ; C53.2@1291.22,2233.7 1281.22,2243.7 v1(1281.22,2270) ; 1310.75,2279.53 1301.22,2270 v1(1281.22,2270) ; C48.2@1335,1911.3 1319.48,1911.3 1316.18,1908 1293.3,1908 1290,1911.3 1283.56,1917.74 ; C43.1@1337.56,2755 C44.1@1382.44,2755 v1(1382.44,2812.44) ; v1(1340,1760) 1340,1756.69 1375,1721.69 1375,1703.7 1400.04,1703.7 1422.44,1726.1 1481.1,1726.1 1526.1,1771.1 1546.1,1771.1 v1(1565,1790) ; 1526.69,2337.8 v1(1545,2356.1) ; 1537.5,2062.5 v1(1560,2085) ; C33.2@1588.91,2690 v2(1615,2690) ; v1(1665,2825) J?.9@1665,2904.92 ; v1(1765,2825) J?.5@1765,2904.92 ; v1(1815,2825) 1815,2894.92 1820,2899.92 J?.3@1815,2904.92 ; C69.1@1956.26,1168.44 C70.1@1996.26,1168.44 C50.1@2036.26,1168.44 2085.48,1168.44 v1(2086.52,1169.48) ; U9.4@2003.7,1285 v2(2080,1285) ; C38.2@2055,2708.7 v2(2055,2735) ; C29.1@2331.77,1435 2318.7,1448.07 2318.7,1475 2345,1501.3 v2(2345,1500) ; C46.2@2370,2143.7 2381.3,2143.7 v2(2400,2125) 2400,2128.7 2404.35,2124.35 C39.2@2434.35,2124.35 ; v2(2410,2660) D31.C@2410,2697 D30.C@2470,2697 2480.7,2686.3 C26.1@2520,2686.3 2568.7,2686.3 v1(2600,2655) ; P3.9@2430,2820 2485,2875 2485,2930 2506,2951 C17.1@2560,2951 ; C15.2@2595,3690 C15.2@2595,3737.64 C15.2@2595,3780 ; C12_M3.1@2650,1166.7 C14_M3.1@2689,1166.7 C71_M3.1@2728,1166.7 2779.22,1166.7 v1(2781.26,1168.74) ; v2(2780,2170) 2785,2165 D1.1@2785,2131.93 ; U8.9@2802.57,2928.66 v1(2802.57,3012.43) ; v2@2845,2210 v2(2846.38,2208.62) D5_TR2.1@2846.38,2164.53 ; v1(2911.76,3271.43) C10.2@2963.31,3271.43 ; v1(2991.32,2873.32) R12.2@2991.32,2912.65 ; C30_TR2.2@2991.95,2205 v2(3025,2205) ; v1@3037.83,3068.91 3058.31,3048.43 C22.2@3058.31,3031.43 ; D7.C@3059.76,3309.03 3077.32,3291.48 3077.32,3264.87 v1(3093.76,3248.43) C9.2@3147.46,3248.43 ; v2(3120,2205) 3121.38,2203.62 D5_TR1.1@3121.38,2164.53 ; D9.C@3122,2535 v1(3165,2535) ; C9.2@3153.46,3254.43 v1(3200.31,3254.43) C21.2@3256.31,3254.43 ; C30_TR1.2@3266.95,2205 v2(3300,2205) ; C12_M4.1@3343.74,1167.44 v1@3467.44,1167.44 ; v2(3500,2165) D5_TR4.1@3548.9,2165 ; C30_TR4.2@3694.47,2200.47 3694.94,2200 v2(3725,2200) ; v2(3795,2140) 3820,2165 D5_TR3.1@3828.9,2165 ; C30_TR3.2@3974.47,2205.47 3975,2206 v2(3975,2255) ; 1283.56,1917.74 1270,1931.3 1283.56,1917.74
  Top Layer w25: C11.2@3360.31,3326.43 v1(3383.31,3303.43)
  Top Layer w35: D20_M1.C@166.26,480 181.26,465 v1(181.26,413.74) ; v1(180,595) D21_M1.C@246.26,595 ; D23_M1.C@653.74,595 v1(720,595) ; v1(738.74,413.74) D22_M1.C@738.74,480 ; v1(861.26,413.74) D20_M2.C@861.26,480 ; v1(875,595) D21_M2.C@941.26,595 ; D23_M2.C@1348.74,595 v1(1415,595) ; v1(1433.74,413.74) D22_M2.C@1433.74,480 ; v1(1556.29,413.71) D25.C@1556.29,479.97 ; v1(1570.03,594.97) D26.C@1636.29,594.97 ; D28.C@2043.77,594.97 v1(2110.03,594.97) ; v1(2128.77,413.71) D27.C@2128.77,479.97 ; v1(2251.26,413.74) D20_M3.C@2251.26,480 ; v1(2265,595) D21_M3.C@2331.26,595 ; D23_M3.C@2738.74,595 v1(2805,595) ; v1(2823.74,413.74) D22_M3.C@2823.74,480 ; v1(2946.26,413.74) D20_M4.C@2946.26,480 ; v1(2960,595) D21_M4.C@3026.26,595 ; D23_M4.C@3433.74,595 v1(3500,595) ; v1(3518.74,413.74) D22_M4.C@3518.74,480
  other v1: 538.77,353.74 3930,370 686.26,383.74 1381.26,383.74 2076.29,383.71 2771.26,383.74 3466.26,383.74 3865,435 3990,500 3865,630 3990,630 3930,695 3865,760 3995,760 3930,825 3865,890 3995,890 256.26,1103.74 951.26,1103.74 1646.52,1104.48 2341.26,1103.74 3036.26,1103.74 191.26,1168.74 256.26,1168.74 886.26,1168.74 951.26,1168.74 1581.52,1169.48 1646.52,1169.48 2276.26,1168.74 2341.26,1168.74 2971.26,1168.74 3036.26,1168.74 3476.26,1168.74 191.26,1233.74 256.26,1233.74 696.26,1233.74 761.26,1233.74 886.26,1233.74 951.26,1233.74 1391.26,1233.74 1456.26,1233.74 1581.52,1234.48 1646.52,1234.48 2086.52,1234.48 2151.52,1234.48 2276.26,1233.74 2341.26,1233.74 2781.26,1233.74 2971.26,1233.74 3036.26,1233.74 3476.26,1233.74 191.26,1298.74 256.26,1298.74 2341.26,1298.74 3390,1315 3555,1335 3044.31,3062.43 830,3100 870,3100 910,3100 950,3100 990,3100 1030,3100 1219,3100.42 1259,3100.42 1299,3100.42 1339,3100.42 1379,3100.42 1419,3100.42 1620,3100 1660,3100 1700,3100 1740,3100 1780,3100 1820,3100 2075.5,3100.81 2115.5,3100.81 2155.5,3100.81 2195.5,3100.81 2235.5,3100.81 850,3140 890,3140 930,3140 970,3140 1010,3140 1239,3140.42 1279,3140.42 1319,3140.42 1359,3140.42 1399,3140.42 1640,3140 1680,3140 1720,3140 1760,3140 1800,3140 2095.5,3140.81 2135.5,3140.81 2175.5,3140.81 2215.5,3140.81 2255.5,3140.81 2695,3155 2830,3155 670,3280 760,3285 610,3340 670,3340 760,3340 550,3400 610,3400 760,3400 2650,3540 2650,3650 2715,3715 2650,3780
  other v2: 1200,2060
  other v3: 363.39,895.69 406.69,895.69 450,895.69 493.31,895.69 536.61,895.69 1058.39,895.69 1101.69,895.69 1145,895.69 1188.31,895.69 1231.61,895.69 1753.65,895.69 1796.95,895.69 1840.26,895.69 1883.57,895.69 1926.87,895.69 2448.39,895.69 2491.69,895.69 2535,895.69 2578.31,895.69 2621.61,895.69 3143.39,895.69 3186.69,895.69 3230,895.69 3273.31,895.69 3316.61,895.69 363.39,939 406.69,939 450,939 493.31,939 536.61,939 1058.39,939 1101.69,939 1145,939 1188.31,939 1231.61,939 1753.65,939 1796.95,939 1840.26,939 1883.57,939 1926.87,939 2448.39,939 2491.69,939 2535,939 2578.31,939 2621.61,939 3143.39,939 3186.69,939 3230,939 3273.31,939 3316.61,939 363.39,982.31 406.69,982.31 450,982.31 493.31,982.31 536.61,982.31 1058.39,982.31 1101.69,982.31 1145,982.31 1188.31,982.31 1231.61,982.31 1753.65,982.31 1796.95,982.31 1840.26,982.31 1883.57,982.31 1926.87,982.31 2448.39,982.31 2491.69,982.31 2535,982.31 2578.31,982.31 2621.61,982.31 3143.39,982.31 3186.69,982.31 3230,982.31 3273.31,982.31 3316.61,982.31
  other v5: 3092.94,3091.06 3132.31,3091.06 3171.68,3091.06 3092.94,3130.43 3132.31,3130.43 3171.68,3130.43 3092.94,3169.8 3132.31,3169.8 3171.68,3169.8
  other v6: 3204,2912 3204,2977
GPIO_P_0: P4.1 U3.1 | length 2220.2
  Top Layer w8: U3.1@2229.49,2546.46 2230,2546.97 2230,2650 2389.47,2809.47 2389.47,2895.53 2380,2905 v2(2380,2935)
  Bottom Layer w8: P4.1@690,3048.53 777.53,2961 1941,2961 1970.53,2990.53 2324.47,2990.53 v2(2380,2935)
GPIO_P_1: P4.3 U3.6 | length 2137.7
  Top Layer w8: U3.6@2131.06,2546.46 2131.06,2602.42 2170.53,2641.89 2170.53,2859.47 v2(2170,2860)
  Bottom Layer w8: P4.3@590,3070 540,3020 540,2950.72 565,2925.72 749.16,2925.72 758.89,2916 1970.21,2916 1971.14,2915.07 1974.93,2915.07 2010.53,2879.47 2150.53,2879.47 v2(2170,2860)
GPIO_P_2: P4.5 U3.8 | length 2090.6
  Top Layer w8: U3.8@2091.69,2546.46 2091.69,2605.48 2115,2628.79 v2(2115,2711.77)
  Bottom Layer w8: P4.5@490,3070 445,3025 445,2935.72 494.72,2886 1875.21,2886 1952.71,2808.5 1964.73,2808.5 2007.23,2766 2060.77,2766 v2(2115,2711.77)
GPIO_P_3: P4.2 U3.5 | length 1945.8
  Top Layer w8: U3.5@2150.75,2546.46 2150.75,2600.9 2189.47,2639.62 2189.47,2836.79 2205,2852.31 v2(2205,2875)
  Bottom Layer w8: P4.2@690,2970 719.28,2940.72 755.38,2940.72 765.1,2931 1953.43,2931 1982.95,2960.53 2146.79,2960.53 2170.53,2936.79 2170.53,2909.47 v2(2205,2875)
GPIO_P_4: P4.4 U3.2 | length 2194.2
  Top Layer w8: U3.2@2209.8,2546.46 2209.8,2729.8 2289.47,2809.47 2289.47,2900.53 2280,2910 v2(2280,2945)
  Bottom Layer w8: P4.4@590,2970 630.53,3010.53 706.79,3010.53 771.31,2946 1947.21,2946 1976.74,2975.53 2250,2975.53 2280,2945.53 v2(2280,2945)
GPIO_P_5: P4.6 U3.7 | length 1976.8
  Top Layer w8: U3.7@2111.38,2546.46 2111.38,2603.95 2140,2632.57 v2(2140,2685)
  Bottom Layer w8: P4.6@490,2970 559,2901 1964,2901 2004.47,2860.53 2064.08,2860.53 2070.53,2854.08 2070.53,2793.26 2140,2723.79 v2(2140,2685)
HOLD#: U3.103 U9.7 | length 703.6
  Top Layer w8: U3.103@2131.06,1715.75 2131.06,1656.06 2115,1640 2115,1485 2125,1475 2125,1305 v2(2155,1275) ; U9.7@2216.3,1385 2240,1385 v2(2275,1350)
  Bottom Layer w8: v2(2155,1275) 2226.31,1275 2275,1323.69 v2(2275,1350)
HTBD: D18.C D19.1 Q7.5 T1.10 TP14.1
  other v1: 2160.5,3300.81 2205.5,3300.81 2250.5,3300.81 2295.5,3300.81 2160.5,3340.81 2205.5,3340.81 2250.5,3340.81 2295.5,3340.81 2160.5,3380.81 2205.5,3380.81 2250.5,3380.81 2295.5,3380.81 2160.5,3420.81 2205.5,3420.81 2250.5,3420.81 2295.5,3420.81
HTR0: D12.1 D13.C Q4.5 T1.4 TP11.1
  other v1: 910,3305 955,3305 1000,3305 1045,3305 910,3345 955,3345 1000,3345 1045,3345 910,3385 955,3385 1000,3385 1045,3385 1160,3415 910,3425 955,3425 1000,3425 1045,3425 1160,3615 975,3810 1160,3810 975,4000 1160,4000
HTR1: D14.C D15.1 Q5.5 T1.6 TP12.1
  other v1: 1305,3300 1350,3300 1395,3300 1440,3300 1305,3340 1350,3340 1395,3340 1440,3340 1305,3380 1350,3380 1395,3380 1440,3380 1560,3415 1305,3420 1350,3420 1395,3420 1440,3420 1560,3615 1375,3810 1560,3810 1375,4000 1560,4000
HTRA: D16.C D17.1 Q6.5 T1.8 TP13.1
  other v1: 1705,3300 1750,3300 1795,3300 1840,3300 1705,3340 1750,3340 1795,3340 1840,3340 1705,3380 1750,3380 1795,3380 1840,3380 1960,3415 1705,3420 1750,3420 1795,3420 1840,3420 1960,3615 1775,3810 1960,3810 1775,4000 1960,4000
I2C_SCL: P3.3 P5.1 U3.70 | length 4334.3
  Top Layer w8: P5.1@200,1440 P5.1@220,1440 275,1495 275,1573.79 346.5,1645.29 346.5,1661.5 390,1705 1070.55,1705 1145.55,1780 1240.8,1780 1286.79,1825.98 U3.70@1469.65,1825.98 1510.98,1825.98 1531.08,1846.08 1531.08,1906.08 1575,1950 v2(1695,1950) ; v2(2335,1695) 2368.71,1695 2408.71,1655 2485,1655 v2(2500,1670)
  Bottom Layer w8: v2(1695,1950) 1708.5,1936.5 1886.5,1936.5 1886.5,1939.73 1900.27,1953.5 1921.5,1953.5 1938.5,1936.5 2246.07,1936.5 2335,1847.57 v2(2335,1695) ; P3.3@2130,2820 2130,2755 2285,2600 2285,2456.36 2351.36,2390 2538.23,2390 2603.5,2324.73 2603.5,2089.86 2500,1986.36 v2(2500,1670)
I2C_SDA: P3.4 P5.2 U3.9 | length 2860.4
  Top Layer w8: P5.2@220,1540 331.5,1651.5 331.5,1667.71 383.79,1720 1064.34,1720 1154.34,1810 v2(1235,1810) ; v2(2080,2385) 2080,2495 2072.01,2502.99 U3.9@2072.01,2546.46 2072.01,2607.01 2085,2620 2085,2875 P3.4@2130,2920
  Bottom Layer w8: v2(1235,1810) 1328.5,1903.5 1328.5,1953.5 1355,1980 1435,1980 1480,2025 1480,2084.2 1539.3,2143.5 1863.5,2143.5 2080,2360 v2(2080,2385)
INPUT_GND: C24.1 C58.2 C59.2 DA4.3 J?.4@215,2324.94 R24.1 U6.2 U6.8 | length 383.9
  Top Layer w22: v1(316.1,2156.1) R24.1@405,2156.1 ; v1(445.88,2550) DA4.3@518.28,2550 ; v1(615,2750) 646.3,2750 650,2753.7 650,2775 U6.2@724.88,2775 ; U6.8@724.88,2475 v1(814.76,2475)
MAX_ES1: C2_ES1.2 DA1.2 MAX1_ES1.1 R3_ES1.1 TP10_ES1.1 U3.76 | length 2102.7
  Top Layer w8: v4(1565,1605) 1565,1635 1599.57,1669.57 U3.76@1599.57,1715.75 ; R3_ES1.1@2870,1436.93 R3_ES1.1@2871.1,1438.03 2871.3,1438.23 2871.3,1486.89 2888.44,1504.03 ; MAX1_ES1.1@2945,1673.03 2945,1560.59 2888.44,1504.03 ; DA1.2@3000,1462.83 3007.6,1470.43 2974,1504.03 2888.44,1504.03
  Bottom Layer w8: v4(1565,1605) 1580,1590 1677.72,1590 1845.95,1421.77 2022.57,1421.77 2074.34,1370 2240.55,1370 2260.55,1390 2456.77,1390 2506.77,1440 2850,1440 v2(2875,1415) ; MAX1_ES1.1@2945,1673.03 TP10_ES1.1@2945,1793.03
MAX_ES2: C2_ES2.2 DA2.2 MAX1_ES2.1 R3_ES2.1 TP10_ES2.1 U3.22 | length 3363.7
  Top Layer w8: U3.22@1816.1,2546.46 1816.1,2331.1 1800,2315 1800,2205.47 1855.47,2150 1855.47,1859.53 1915,1800 v2(1920,1800) ; v2(3680,1405) 3701.1,1426.1 3701.1,1486.69 3727.44,1513.03 3800,1513.03 ; MAX1_ES2.1@3775,1673.03 3775,1538.03 3837.6,1475.43 DA2.2@3835,1472.83
  Bottom Layer w8: v2(1920,1800) 1920,1770 2110,1580 2160,1580 2220,1520 2246.21,1520 2306.21,1460 2435,1460 2475,1500 2916.21,1500 2945.9,1529.69 3535.11,1529.69 3576,1488.8 3576,1469 3640,1405 v2(3680,1405) ; MAX1_ES2.1@3775,1673.03 TP10_ES2.1@3775,1793.03